# EAGLE board PinBed (EAGLE 7.5.0)
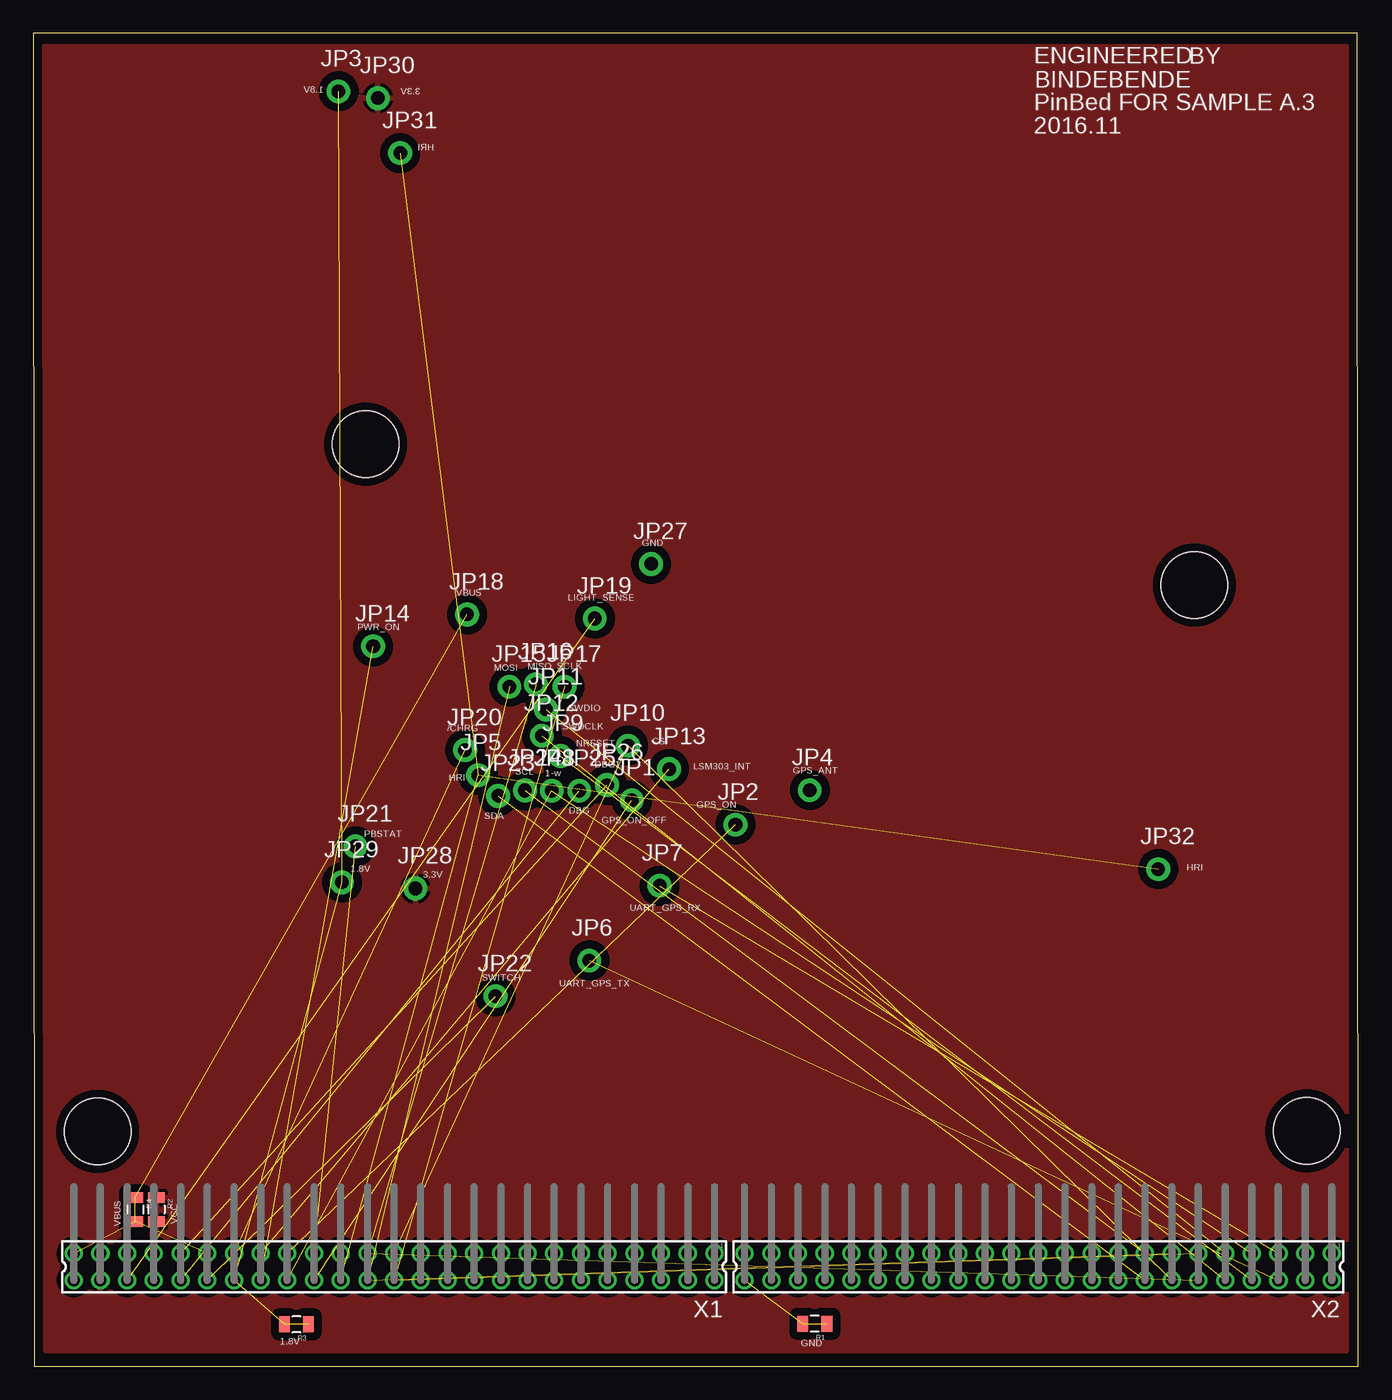
[diagram p0: board, top side]
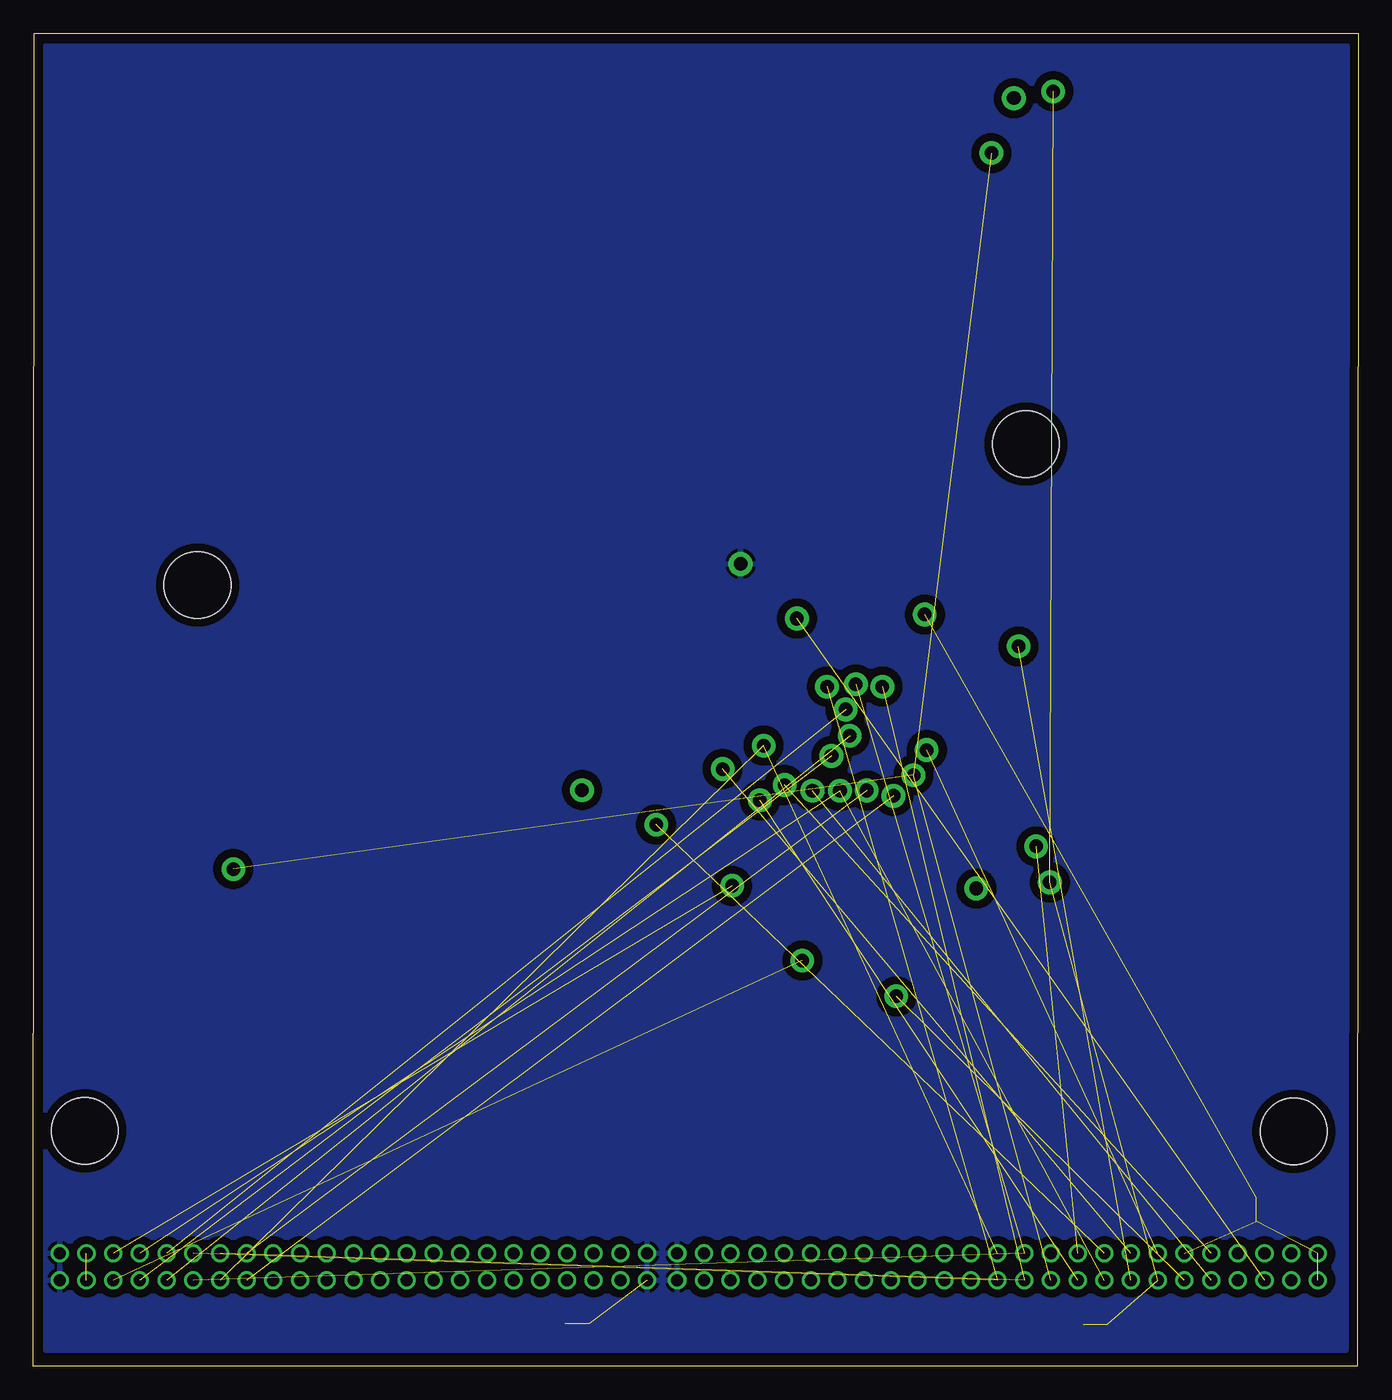
[diagram p1: board, bottom side, seen from below]

Size 99.26 x 99.85 mm. Coordinates in mm from the lower left corner, seen from the top.
Outline: 0.08,0 99.26,0 99.19,99.85 0,99.85 0.08,0
Copper layers (1*16): Top 0.035mm / dielectric 1.5mm / Bottom 0.035mm
Design rules "default *": minimum track width 6mil, minimum drill 12mil, track to track 6mil, track to pad 6mil, pad to pad 6mil, via to via 6mil, smd to smd 6mil, copper to edge 6mil, drill to drill 8mil, minimum pad ring 6mil, minimum via ring 6mil, stop-mask expansion 4mil, vias tented up to drill 0mil, thermal gap 10mil
Net classes: 0 default: clearance 0.152 mm; 1 Power: width 0.508 mm
Holes 5 mm at 4.83,17.6 95.4,17.63 24.89,69.06 86.97,58.52

## Footprints (pad centres in the part's own frame; a part is rotated, then mirrored left to right if it is on the bottom)
1X01-CLEANBIG = drill 1.016 pad 1.778: 1 0,0
0805 = smd 0.8 x 1.2: 1 -0.9,0; 2 0.9,0
332-50 = drill 0.9 pad 1.27: 1 -24,-1; 2 -24,1; 3 -22,-1; 4 -22,1; 5 -20,-1; 6 -20,1; 7 -18,-1; 8 -18,1; 9 -16,-1; 10 -16,1; 11 -14,-1; 12 -14,1; 13 -12,-1; 14 -12,1; 15 -10,-1; 16 -10,1; 17 -8,-1; 18 -8,1; 19 -6,-1; 20 -6,1; 21 -4,-1; 22 -4,1; 23 -2,-1; 24 -2,1; 25 0,-1; 26 0,1; 27 2,-1; 28 2,1; 29 4,-1; 30 4,1; 31 6,-1; 32 6,1; 33 8,-1; 34 8,1; 35 10,-1; 36 10,1; 37 12,-1; 38 12,1; 39 14,-1; 40 14,1; 41 16,-1; 42 16,1; 43 18,-1; 44 18,1; 45 20,-1; 46 20,1; 47 22,-1; 48 22,1; 49 24,-1; 50 24,1
332-46 = drill 0.9 pad 1.27: 1 -22,-1; 2 -22,1; 3 -20,-1; 4 -20,1; 5 -18,-1; 6 -18,1; 7 -16,-1; 8 -16,1; 9 -14,-1; 10 -14,1; 11 -12,-1; 12 -12,1; 13 -10,-1; 14 -10,1; 15 -8,-1; 16 -8,1; 17 -6,-1; 18 -6,1; 19 -4,-1; 20 -4,1; 21 -2,-1; 22 -2,1; 23 0,-1; 24 0,1; 25 2,-1; 26 2,1; 27 4,-1; 28 4,1; 29 6,-1; 30 6,1; 31 8,-1; 32 8,1; 33 10,-1; 34 10,1; 35 12,-1; 36 12,1; 37 14,-1; 38 14,1; 39 16,-1; 40 16,1; 41 18,-1; 42 18,1; 43 20,-1; 44 20,1; 45 22,-1; 46 22,1

## Placement (x,y rotation side)
JP1  [1X01-CLEANBIG]  44.83,42.39 0 top
JP2  [1X01-CLEANBIG]  52.6,40.56 0 top
JP3  [1X01-CLEANBIG]  22.86,95.5 0 top
JP4  [1X01-CLEANBIG]  58.17,43.15 0 top
JP5  [1X01-CLEANBIG]  33.32,44.27 0 top
JP6  [1X01-CLEANBIG]  41.66,30.38 0 top
JP7  [1X01-CLEANBIG]  46.91,35.99 0 top
JP8  [1X01-CLEANBIG]  38.84,43.1 0 top
JP9  [1X01-CLEANBIG]  39.47,45.72 0 top
JP10  [1X01-CLEANBIG]  44.55,46.48 0 top
JP11  [1X01-CLEANBIG]  38.4,49.2 0 top
JP12  [1X01-CLEANBIG]  38.1,47.22 0 top
JP13  [1X01-CLEANBIG]  47.62,44.73 0 top
JP14  [1X01-CLEANBIG]  25.45,53.92 0 top
JP15  [1X01-CLEANBIG]  35.66,50.9 0 top
JP16  [1X01-CLEANBIG]  37.64,51.08 0 top
JP17  [1X01-CLEANBIG]  39.8,50.9 0 top
JP18  [1X01-CLEANBIG]  32.49,56.31 0 top
JP19  [1X01-CLEANBIG]  42.06,56.01 0 top
JP20  [1X01-CLEANBIG]  32.33,46.15 0 top
JP21  [1X01-CLEANBIG]  24.13,38.94 0 top
JP22  [1X01-CLEANBIG]  34.62,27.71 0 top
JP23  [1X01-CLEANBIG]  34.82,42.72 0 top
JP24  [1X01-CLEANBIG]  36.83,43.13 0 top
JP25  [1X01-CLEANBIG]  40.89,43.1 0 top
JP26  [1X01-CLEANBIG]  42.98,43.54 0 top
JP27  [1X01-CLEANBIG]  46.28,60.1 0 top
JP28  [1X01-CLEANBIG]  28.63,35.79 0 top
JP29  [1X01-CLEANBIG]  23.11,36.25 0 top
JP30  [1X01-CLEANBIG]  25.81,95 0 top
JP31  [1X01-CLEANBIG]  27.48,90.88 0 top
JP32  [1X01-CLEANBIG]  84.28,37.24 0 top
R1  [0805]  58.55,3.17 180 top
R2  [0805]  9.22,11.73 270 top
R3  [0805]  19.71,3.12 180 top
R4  [0805]  7.65,11.73 270 top
X1  332-50  [332-50]  27.03,7.44 180 top
X2  332-46  [332-46]  75.29,7.44 180 top

## Library data of the parts
JP1-JP32 = JDT-1800_smahed
R1-R4 = SparkFun-Passives
X1 X2 = con-garry

## Nets
/CHRG: JP20.1 X1.37
A1: X1.45
A2: X1.44
A3: X1.43
CAN_N: X2.17
CAN_P: X2.18
CS: JP10.1 X1.25 X2.14
D13: X1.29
D18: X1.24
D19: X1.23
D20: X1.22
D21: X1.21
D22: X1.20
D23: X1.19
D24: X1.18
D25: X1.17
D26: X1.16
D27: X1.15
D28: X1.14
D29: X1.13
D30: X1.12
D31: X1.11
D32: X1.10
D33: X1.9
D34: X1.8
D35: X1.7
D36: X1.6
D37: X1.5
D38: X1.4
D39: X1.3
D40: X2.42
D41: X2.41
D42: X2.40
D43: X2.39
D44: X2.38
D45: X2.37
D46: X2.36
D47: X2.35
D48: X2.34
D49: X2.33
D50: X2.32
D51: X2.31
D52: X2.30
D53: X2.29
D54: X2.28
D55: X2.27
D56: X2.26
D57: X2.25
D58: X2.24
D59: X2.23
D60: X2.22
D61: X2.21
D62: X2.20
D63: X2.19
DEBUG: JP25.1 X1.42
DEBUG1: JP26.1 X1.41
GND [Power]: JP27.1 R1.1 R1.2 X1.1 X1.2 X2.1 X2.2 X2.45 X2.46
GPS_ANT: JP4.1
GPS_ON_OFF: JP1.1 X1.32
HEART_RATE_INT: JP5.1 JP31.1 JP32.1 X1.30
LIGHT_SENSE: JP19.1 X1.46
LSM303_INT: JP13.1 X1.35
LTC_VCC1.8V [Power]: JP3.1 JP29.1 R3.1 R3.2 X1.38
MISO: JP16.1 X1.27 X2.12
MOSI: JP15.1 X1.28 X2.13
NRESET: JP9.1 X2.8
ONEWIRE: JP8.1 X1.34 X2.7
PBSTAT: JP21.1 X1.31
PWR_ON: JP14.1 X1.36
SCL: JP24.1 X2.15
SCLK: JP17.1 X1.26 X2.11
SDA: JP23.1 X2.16
SWDCLK: JP12.1 X2.10
SWDIO: JP11.1 X2.9
SWITCH: JP22.1 X1.40
SYSTEM_ON: JP2.1 X1.33
UART_GPS_RX: JP7.1 X2.5
UART_GPS_TX: JP6.1 X2.6
VBAT: X2.3 X2.4
VBUS [Power]: JP18.1 R4.1 R4.2 X1.39 X1.49 X1.50
VCC [Power]: JP28.1 JP30.1 R2.1 R2.2 X1.47 X1.48

## Tracks (layer width: path | path; a pad name or v marks a point on that pad's centre or on a via)
/CHRG  (1 unrouted)
CS  (2 unrouted)
DEBUG  (1 unrouted)
DEBUG1  (1 unrouted)
GND  (2 unrouted)
  pour Bottom (isolate 0.61): 0.94,1.19 98.35,1.19 98.35,98.88 0.81,98.88 0.81,1.63
GPS_ON_OFF  (1 unrouted)
HEART_RATE_INT  (3 unrouted)
LIGHT_SENSE  (1 unrouted)
LSM303_INT  (1 unrouted)
LTC_VCC1.8V  (4 unrouted)
MISO  (2 unrouted)
MOSI  (2 unrouted)
NRESET  (1 unrouted)
ONEWIRE  (2 unrouted)
PBSTAT  (1 unrouted)
PWR_ON  (1 unrouted)
SCL  (1 unrouted)
SCLK  (2 unrouted)
SDA  (1 unrouted)
SWDCLK  (1 unrouted)
SWDIO  (1 unrouted)
SWITCH  (1 unrouted)
SYSTEM_ON  (1 unrouted)
UART_GPS_RX  (1 unrouted)
UART_GPS_TX  (1 unrouted)
VBAT  (1 unrouted)
VBUS  (5 unrouted)
VCC
  pour Top (isolate 0.61): 0.97,1.14 98.37,1.14 98.37,98.83 0.84,98.83 0.84,1.57

## Text on the board
tPlace: ENGINEERED | BY | 1.8V | 3.3V | BINDEBENDE | PinBed FOR SAMPLE A.3 | HRI | 2016.11 | GND | VBUS | LIGHT_SENSE | PWR_ON | MOSI | MISO | SCLK | SWDIO | /CHRG | SWDCLK | NRESET | CS | DBG1 | LSM303_INT | GPS_ANT | HRI | SCL | 1-w | DBG | GPS_ON | SDA | GPS_ON_OFF | PBSTAT | 1.8V | 3.3V | HRI | UART_GPS_RX | SWITCH | UART_GPS_TX | VBUS | VCC | 1.8V | GND